# EAGLE board pcb_power (EAGLE 9.6.2)
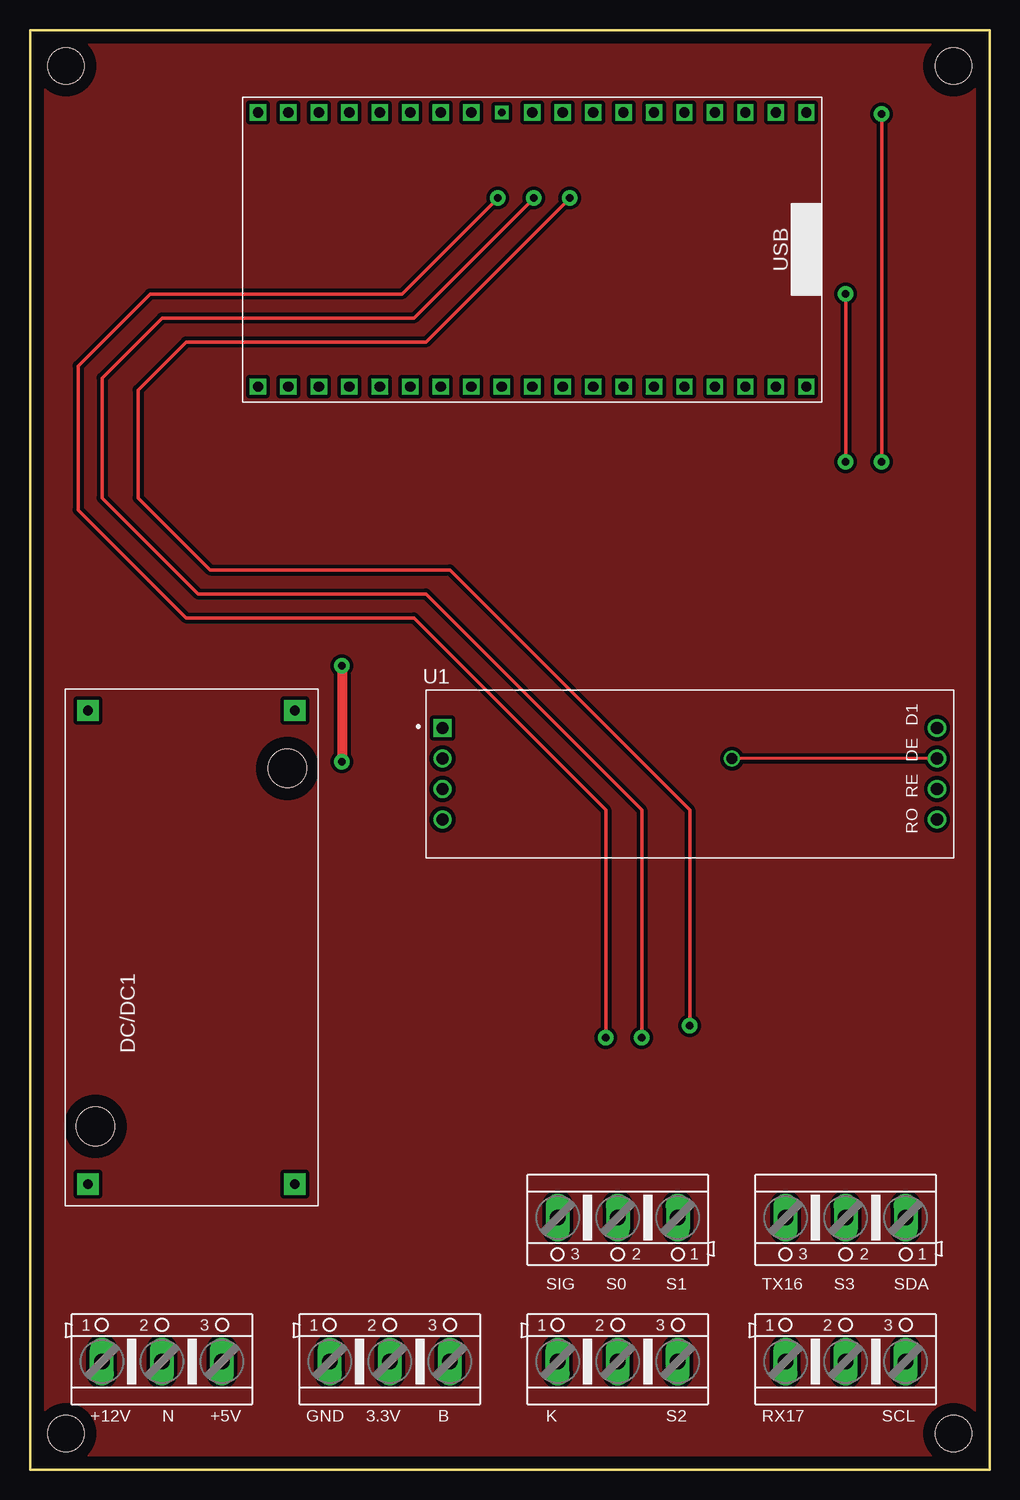
[diagram p0: board, top side]
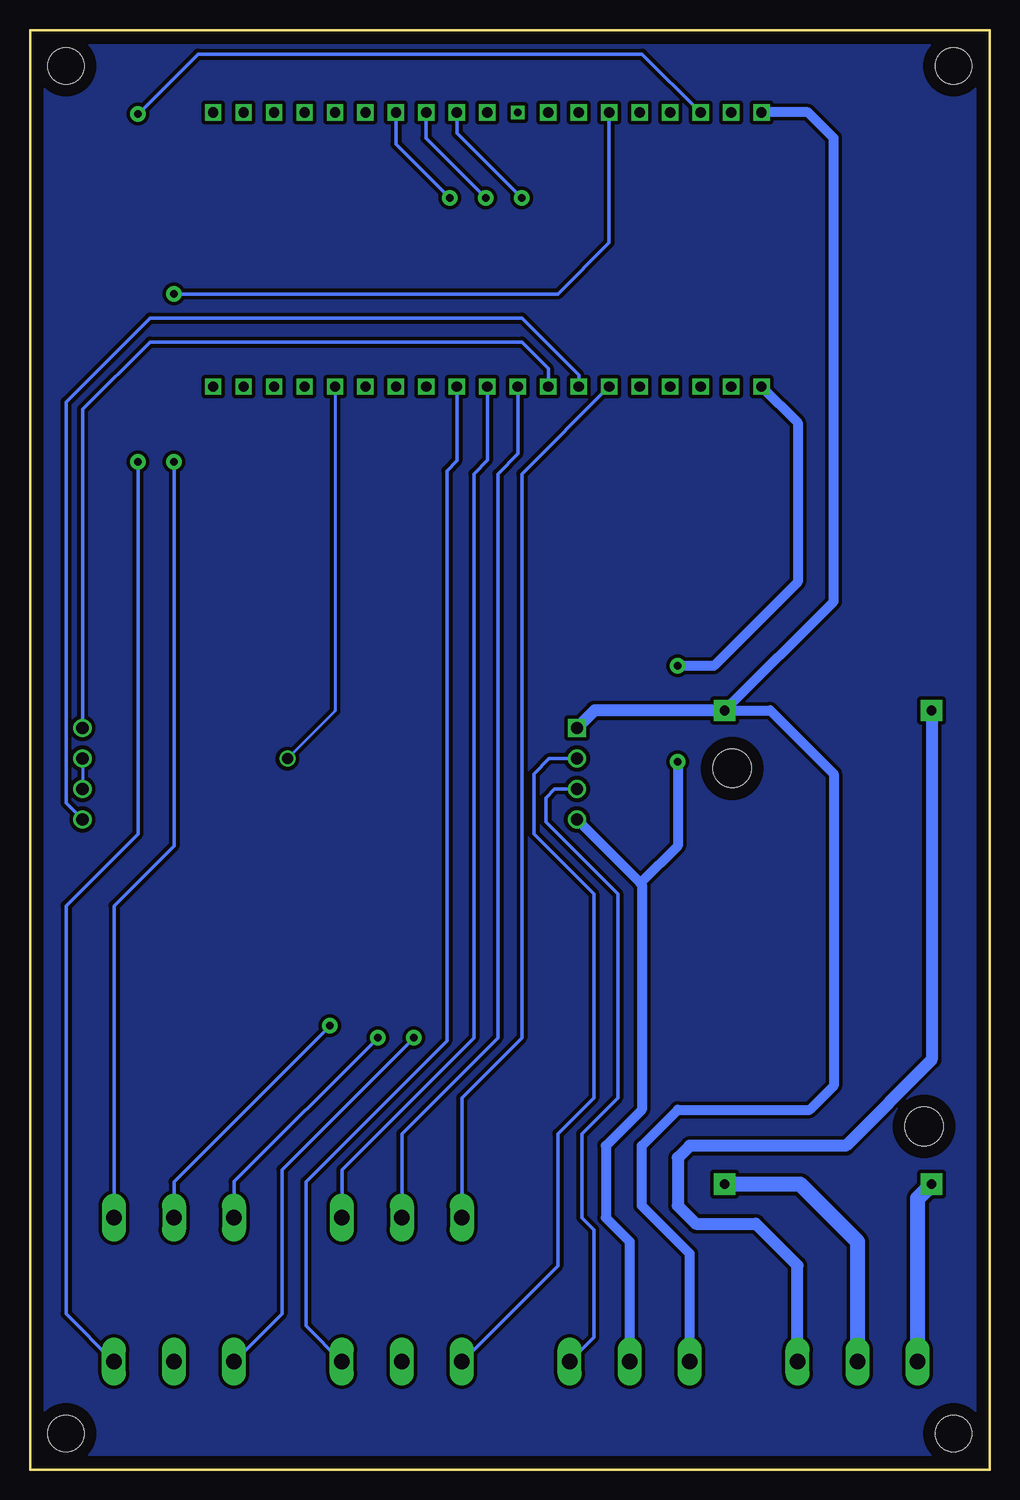
[diagram p1: board, bottom side, seen from below]

Size 80 x 120 mm. Coordinates in mm from the lower left corner, seen from the top.
Outline: 0,0 80,0 80,120 0,120 0,0
Copper layers (1*16): Top 0.035mm / dielectric 1.5mm / Bottom 0.035mm
Design rules "default *": minimum track width 10mil, minimum drill 0.61mm, track to track 12mil, track to pad 12mil, pad to pad 12mil, via to via 12mil, smd to smd 12mil, copper to edge 40mil, drill to drill 6mil, minimum pad ring 10mil, minimum via ring 8mil, stop-mask expansion 4mil, vias tented up to drill 0mil, thermal gap 10mil
Holes 3 mm at 3,117 77,117 77,3 3,3

## Footprints (pad centres in the part's own frame; a part is rotated, then mirrored left to right if it is on the bottom)
XL6009_DC_BUCK/BOOST_MODULE = drill 0.8 pad 1.778 square: +IN 1.778,19.177; +OUT 41.275,19.177; -IN 1.778,1.905; -OUT 41.275,1.905 | hole 3.2: 6.604,18.542; 36.449,2.54
MODULE_MAX485_MODULE_5V_LOGIC_TLL_TO_RS-485_CONVERTER = drill 1.02 square: 1 -20.6,3.81 | drill 1.02: 2 -20.6,1.27; 3 -20.6,-1.27; 4 -20.6,-3.81; 5 20.62,-3.81; 6 20.62,-1.27; 7 20.62,1.27; 8 20.62,3.81
ESP32 = drill 0.85 square: 3.3V 1.27,46.99; 5V 1.27,1.27; EN 1.27,44.45; GND1 1.27,13.97; GND2 24.13,46.99; GND3 24.13,31.75; GPIO0 24.13,13.97; GPIO2 24.13,11.43; GPIO4 24.13,16.51; GPIO5 24.13,24.13; GPIO6 24.13,1.27; GPIO7 24.13,3.81; GPIO8 24.13,6.35; GPIO9 1.27,8.89; GPIO10 1.27,6.35; GPIO11 1.27,3.81; GPIO12 1.27,16.51; GPIO13 1.27,11.43; GPIO14 1.27,19.05; GPIO15 24.13,8.89; GPIO16 24.13,19.05; GPIO17 24.13,21.59; GPIO19 24.13,29.21; GPIO21 24.13,34.29; GPIO22 24.13,41.91; GPIO23 24.13,44.45; GPIO25 1.27,26.67; GPIO26 1.27,24.13; GPIO27 1.27,21.59; GPIO32 1.27,31.75; GPIO33 1.27,29.21; GPIO34 1.27,36.83; GPIO35 1.27,34.29; GPIO36 1.27,41.91; GPIO39 1.27,39.37; RX 24.13,36.83; TX 24.13,39.37 | drill 0.6 square: GPIO18 24.13,26.67
AK500/3 = drill 1.321 long: 1 -5.004,0; 2 0,0; 3 5.004,0

## Placement (x,y rotation side)
DC/DC1  XL6009_DC_BUCK/BOOST_MODULE  [XL6009_DC_BUCK/BOOST_MODULE]  24,22 90 top
U1  MAX485_MODULE_5V_LOGIC_TLL_TO_RS-485_CONVERTER  [MODULE_MAX485_MODULE_5V_LOGIC_TLL_TO_RS-485_CONVERTER]  55,58 0 top
U$1  ESP32  [ESP32]  66,89 90 top
X1  [AK500/3]  11,9 0 top
X2  [AK500/3]  30,9 0 top
X3  [AK500/3]  49,9 0 top
X4  [AK500/3]  68,9 0 top
X5  [AK500/3]  49,21 180 top
X6  [AK500/3]  68,21 180 top

## Library data of the parts
DC/DC1 = DC Module
U1 = MAX485_MODULE_5V_LOGIC_TLL_TO_RS-485_CONVERTER; AVAILABILITY: Not in stock; CHECK_PRICES: https://www.snapeda.com/parts/MAX485%20Module%205V%20logic%20TLL%20to%20RS-485%20converter/e-Gizmo+Mechatronix+Central/view-part/?ref=eda; DESCRIPTION: 5V MAX485 TTL To RS485 Converter Module Board for Arduino; MF: e-Gizmo Mechatronix Central; MP: MAX485 Module 5V logic TLL to RS-485 converter; PACKAGE: Package; PRICE: None; SNAPEDA_LINK: https://www.snapeda.com/parts/MAX485%20Module%205V%20logic%20TLL%20to%20RS-485%20converter/e-Gizmo+Mechatronix+Central/view-part/?ref=snap
U$1 = ESP32
X1-X6 = con-ptr500; OC_FARNELL: unknown; OC_NEWARK: unknown

## Nets
N$1: DC/DC1.+IN X1.1
N$2: DC/DC1.-IN X1.2
N$3: U1.2 X3.1
N$4: U1.3 X2.3
N$5: U$1.GPIO21 X6.1
N$6: U$1.GPIO22 X4.3
N$7: DC/DC1.+OUT X1.3
N$8: U$1.GPIO17 X4.1
N$9: U1.4 U$1.3.3V X2.2
N$10: U$1.GPIO16 X6.3
N$12: U$1.GPIO35 X5.3
N$13: U$1.GPIO4 X6.2
N$14: U$1.GPIO27 X3.3
N$15: U$1.GPIO26 X5.1
N$16: U$1.GPIO25 X5.2
N$17: U1.5 U$1.GPIO32
N$18: U1.8 U$1.GPIO33
N$19: U1.6 U1.7 U$1.GPIO13
N$20: DC/DC1.-OUT U1.1 U$1.GND2 X2.1

## Tracks (layer width: path | path; a pad name or v marks a point on that pad's centre or on a via)
GND
  pour Bottom (isolate 0.254): 80,120 80,0 0,0 0,120
  pour Top (isolate 0.254): 0,0 80,0 80,120 0,120
N$1
  Bottom 1.27: X1.1 6,22.61 DC/DC1.+IN
N$2
  Bottom 1.27: X1.2 11,19 15.78,23.78 DC/DC1.-IN
N$3
  Bottom 0.305: X3.1 36,17 36,28 33,31 33,48 38,53 38,58 36.73,59.27 U1.2
N$4
  Bottom 0.305: X2.3 33,11 33,20 34,21 34,28 31,31 31,48 37,54 37,56 36.27,56.73 U1.3
N$5  (via drill 0.61 pad 1.27)
  Top 0.305: v68,98 v68,84
  Bottom 0.305: X6.1 73,47 68,52 v68,84 | U$1.GPIO21 31.71,102.29 36,98 v68,98
N$6  (via drill 0.61 pad 1.27)
  Top 0.305: v71,113 v71,84
  Bottom 0.305: v71,84 71,53 77,47 77,13 X4.3 | v71,113 66,118 28.96,118 U$1.GPIO22
N$7
  Bottom 1.016: X1.3 16,17 19.5,20.5 24.5,20.5 26,22 26,26 25,27 12,27 4.82,34.18 DC/DC1.+OUT
N$8  (via drill 0.61 pad 1.27)
  Top 0.305: v39,106 31,98 10,98 4,92 4,80 13,71 32,71 48,55 v48,36
  Bottom 0.305: U$1.GPIO17 44.41,111.41 v39,106 | v48,36 59,25 59,13 X4.1
N$9  (via drill 0.61 pad 1.27)
  Top 0.813: v26,67 v26,59
  Bottom 0.813: X2.2 30,19 32,21 32,27 29,30 29,48.79 29.11,48.9 | U1.4 29.11,48.9 | U$1.3.3V 16,87.26 16,74 23,67 v26,67 | v26,59 26,52 29.11,48.9
N$10  (via drill 0.61 pad 1.27)
  Top 0.305: v51,36 51,55 33,73 14,73 6,81 6,91 11,96 32,96 v42,106
  Bottom 0.305: U$1.GPIO16 47,113.08 47,111 v42,106 | v51,36 63,24 X6.3
N$12
  Bottom 0.305: U$1.GPIO35 39,82.98 39,36 44,31 44,28 X5.3
N$13  (via drill 0.61 pad 1.27)
  Top 0.305: v55,37 55,55 35,75 15,75 9,81 9,90 13,94 33,94 v45,106
  Bottom 0.305: U$1.GPIO4 49.49,110.49 v45,106 | v55,37 68,24 X6.2
N$14
  Bottom 0.305: U$1.GPIO27 44.41,84.09 45.25,83.25 45.25,35.75 57,24 57,12 X3.3
N$15
  Bottom 0.305: X5.1 54,25 43,36 43,83 41.87,84.13 U$1.GPIO26
N$16
  Bottom 0.305: X5.2 49,28 47,30 41,36 41,83 39.33,84.67 U$1.GPIO25
N$17
  Bottom 0.305: U1.5 77,55.57 77,89 70,96 39,96 34.25,91.25 U$1.GPIO32
N$18
  Bottom 0.305: U1.8 75.62,88.38 70,94 39,94 36.79,91.79 U$1.GPIO33
N$19  (via drill 0.9)
  Top 0.254: U1.7 v58.53,59.27
  Bottom 0.254: U1.7 U1.6 | U$1.GPIO13 54.57,63.23 v58.53,59.27
N$20
  Bottom 0.813: U$1.GND2 15.13,113.13 13,111 13,72.37 DC/DC1.-OUT 18.27,63.27 13,58 13,32 15,30 26,30 29,27 29,22 25,18 X2.1
  Bottom 1.016: DC/DC1.-OUT 32.94,63.27 U1.1

## Text on the board
tPlace: D1 | DE | RE | RO | SIG | S0 | S1 | TX16 | S3 | SDA | +12V | N | +5V | GND | 3.3V | B | K | S2 | RX17 | SCL